# Altium PCB JTAG_XILINX.PcbDoc (part 1 of 2)
Units mm, origin at the board's own origin, x right, y up, seen from the top; angles counter-clockwise.
Board outline 27.94 x 27.94 mm, 4 copper layers (Top Layer, GND, PWR, Bottom Layer), stack 0.603 mm thick; 44 components, 49 nets, 1237 pads, 94 vias.
Unrouted connection lines stored in the file: 218.
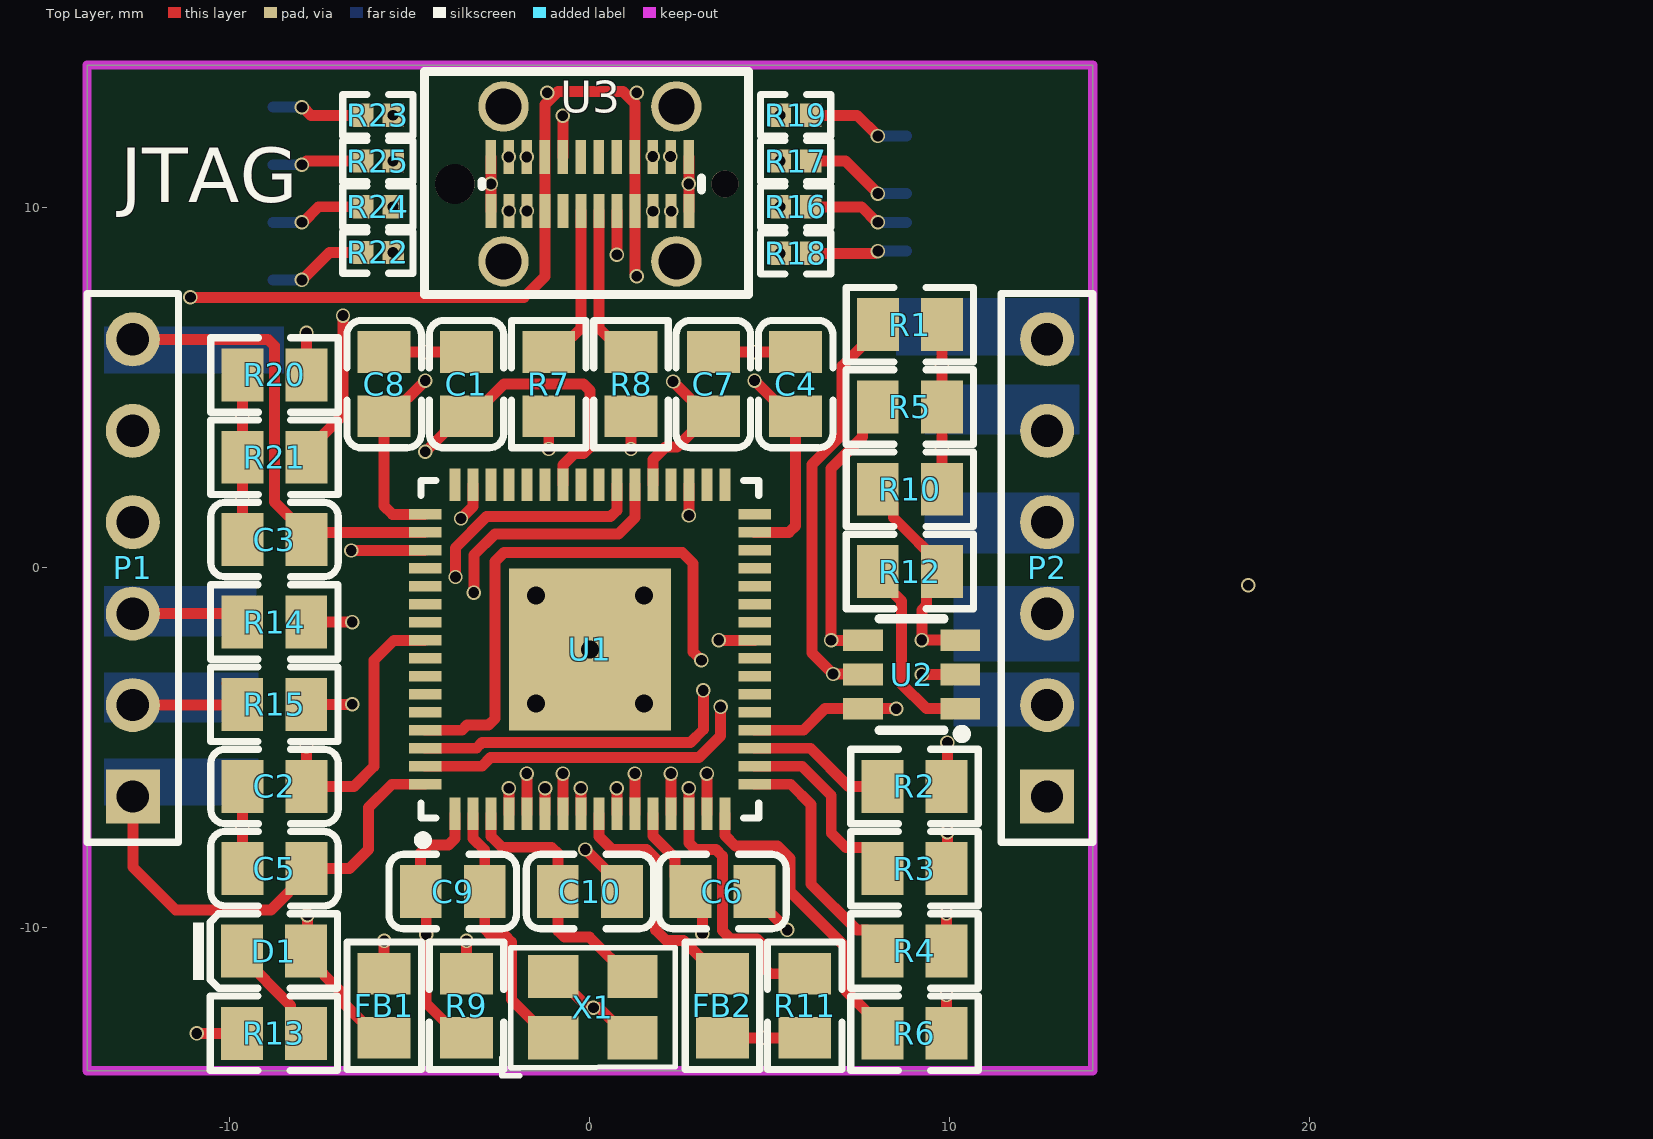
[diagram p0: Top Layer view]
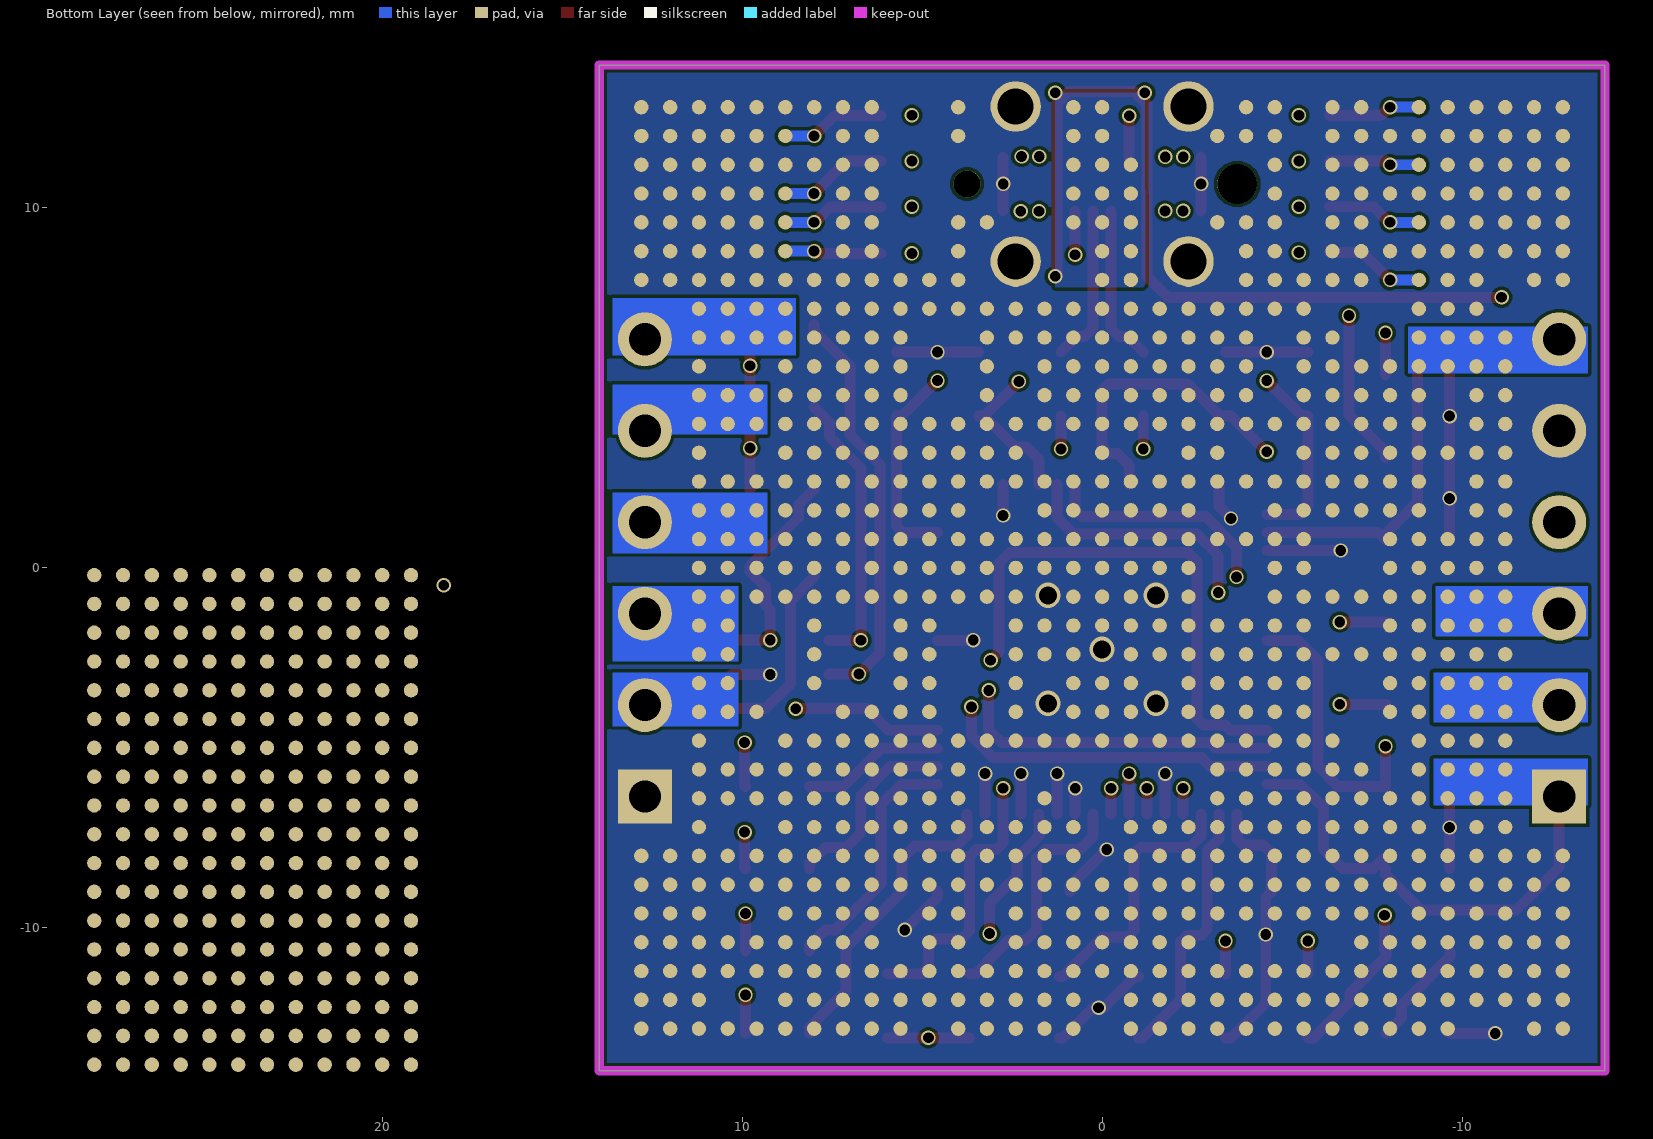
[diagram p1: Bottom Layer view, seen from below]
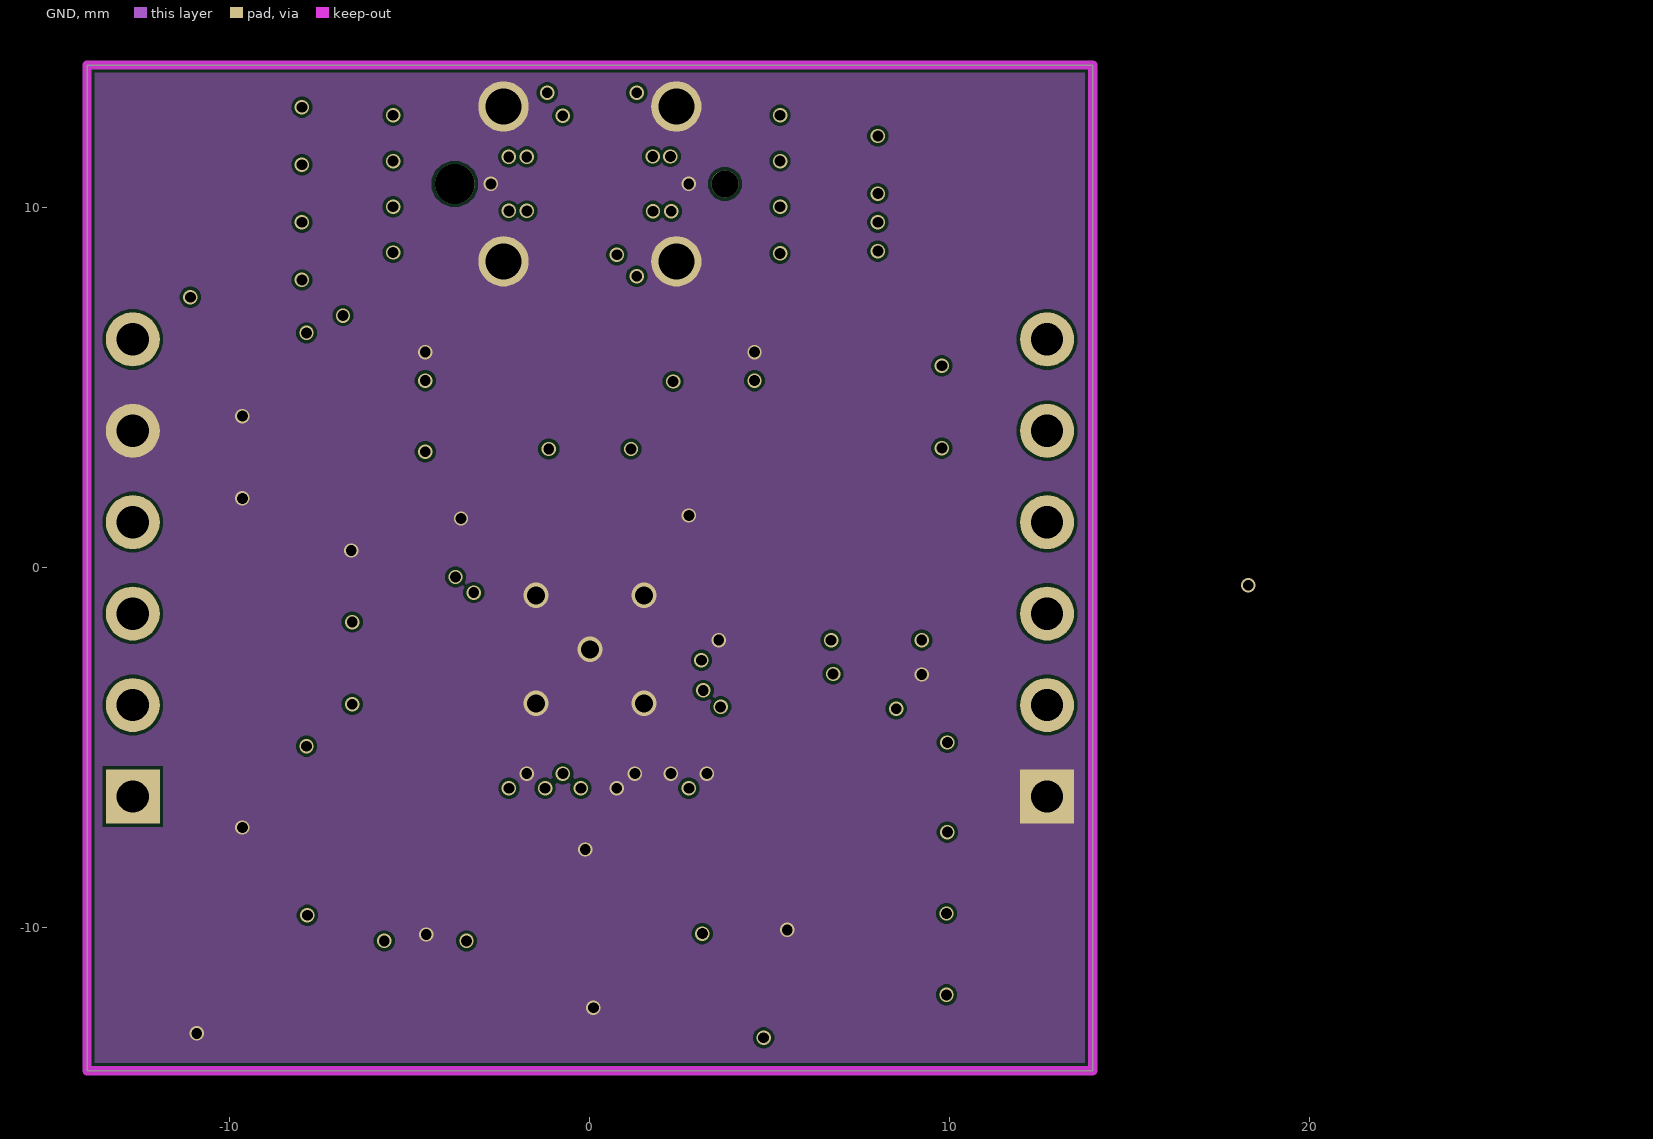
[diagram p2: GND]
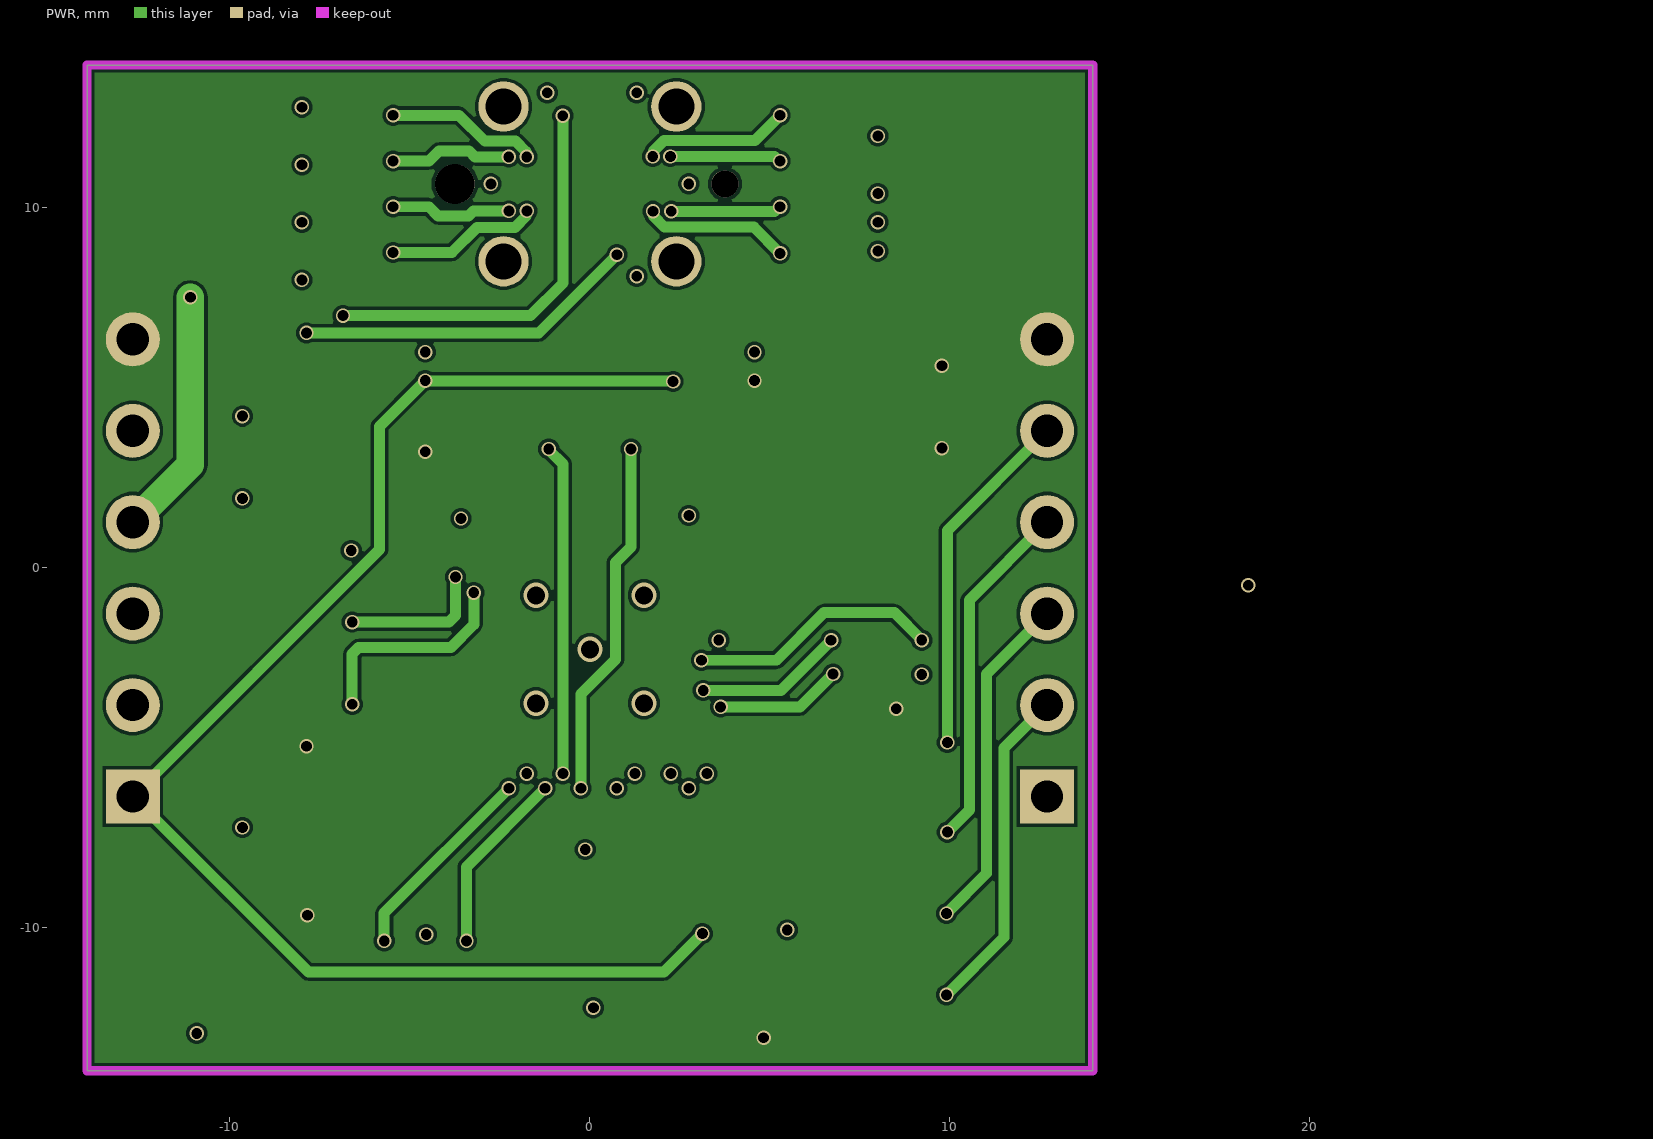
[diagram p3: PWR]

## Layer stack, top to bottom
Top Solder: solder mask 0.0102, Solder Resist, Dk 3.5
Top Layer: signal copper 0.0356
Dielectric 2: prepreg 0.0711, PP-006, Dk 4.1
GND: signal copper 0.035
Dielectric 1: dielectric 0.32, FR-4, Dk 4.8
PWR: signal copper 0.035
Dielectric 3: prepreg 0.0711, PP-006, Dk 4.1
Bottom Layer: signal copper 0.0356
Bottom Solder: solder mask 0.0102, Solder Resist, Dk 3.5

## Board outline
-13.97,-13.97 -13.97,13.97 13.97,13.97 13.97,-13.97

## Design rules (kind name [scope] priority, off if disabled: settings)
Clearance [All] p1: gap=0.089 ignorepadtopadclearanceinfootprint=FALSE
DiffPairsRouting [All] p1: maxlimit=0.254 minlimit=0.089 mostfreqgap=0.254 toplayer_minwidth=0.089 toplayer_maxwidth=0.381 toplayer_prefwidth=0.305 midlayer1_minwidth=0.089 midlayer1_maxwidth=0.381 midlayer1_prefwidth=0.305 midlayer2_minwidth=0.089 midlayer2_maxwidth=0.381 midlayer2_prefwidth=0.305 bottomlayer_minwidth=0.089 bottomlayer_maxwidth=0.381 bottomlayer_prefwidth=0.305 maxuncoupledlength=12.7
PlaneConnect [All] p1: planeconnectstyle=Direct reliefexpansion=0.508 reliefentries=4 reliefconductorwidth=0.254 reliefairgap=0.254
PolygonConnect [All] p1: connectstyle=Direct reliefconductorwidth=0.254 reliefentries=4 polygonreliefangle="90 Angle" airgapwidth=0.254
RoutingVias [All] p1: holewidth=0.711 width=1.27 viastyle="Through Hole" minholewidth=0.711 minwidth=1.27 maxholewidth=0.711 maxwidth=1.27
SolderMaskExpansion [All] p1: expansion=0.102 istentingtop=FALSE
SupplyNets "Schematic Supply Nets_11" [InNet('TX2N')] p1: voltage=0.000
SupplyNets "Schematic Supply Nets_10" [InNet('RX2N')] p2: voltage=0.000
SupplyNets "Schematic Supply Nets_9" [InNet('TX1N')] p3: voltage=0.000
SupplyNets "Schematic Supply Nets_8" [InNet('VCC_5V')] p4: voltage=0.000
SupplyNets "Schematic Supply Nets_7" [InNet('GND')] p5: voltage=0.000
SupplyNets "Schematic Supply Nets_6" [InNet('VCC_1V8')] p6: voltage=0.000
SupplyNets "Schematic Supply Nets_5" [InNet('RX1N')] p7: voltage=0.000
SupplyNets "Schematic Supply Nets_4" [InNet('VCC_3V3')] p8: voltage=0.000
SupplyNets "Schematic Supply Nets_3" [InNet('TX2P')] p9: voltage=0.000
SupplyNets "Schematic Supply Nets_2" [InNet('TX1P')] p10: voltage=0.000
SupplyNets "Schematic Supply Nets_1" [InNet('RX1P')] p11: voltage=0.000
SupplyNets "Schematic Supply Nets" [InNet('RX2P')] p12: voltage=0.000
Width [All] p1: maxlimit=2.54 minlimit=0.089 preferedwidth=0.305
28 further rules are at their usual default settings.

## Classes and differential pairs
differential pair USB_D: +USB_D_p -USB_D_n

## Components (designator, comment, footprint, x,y, rotation, side; value= is the part's Value field where it differs from the comment)
C1 "100nF" 0805_C -3.429,5.105 r270 top
C2 "100nF" 0805_C -8.763,-6.071 r0 top
C3 "100nF" 0805_C -8.763,0.787 r0 top
C4 "100nF" 0805_C 5.715,5.105 r270 top
C5 "100nF" 0805_C -8.763,-8.357 r0 top
C6 "100nF" 0805_C 3.683,-8.992 r180 top
C7 "100nF" 0805_C 3.429,5.106 r270 top
C8 "4.7uF" 0805_C -5.715,5.105 r270 top
C9 "12pF (120) 5% 50V" 0805_C -3.811,-8.992 r0 top
C10 "12pF (120) 5% 50V" 0805_C 0,-8.992 r180 top
D1 "翠绿 0805" 0805_LED_S1 -8.778,-10.645 r0 top
FB1 "100Ω ±25% 100MHz" 0805_L -5.715,-12.167 r270 top
FB2 "100Ω ±25% 100MHz" 0805_L 3.683,-12.166 r270 top
P1 "Header 6" HDR1X6 -12.7,-6.35 r90 top locked
P2 "Header 6" HDR1X6 12.7,-6.35 r90 top locked
R1 "10KΩ (1002) ±1%" 0805_R 8.891,6.756 r0 top
R2 "33Ω" 0805_R 9.018,-6.071 r0 top
R3 "33Ω" 0805_R 9.018,-8.357 r0 top
R4 "33Ω" 0805_R 9.018,-10.643 r0 top
R5 "10KΩ (1002) ±1%" 0805_R 8.889,4.47 r0 top
R6 "33Ω" 0805_R 9.018,-12.929 r0 top
R7 "33Ω" 0805_R -1.143,5.105 r270 top
R8 "33Ω" 0805_R 1.143,5.105 r270 top
R9 "12KΩ" 0805_R -3.429,-12.167 r90 top
R10 "10KΩ (1002) ±1%" 0805_R 8.89,2.184 r0 top
R11 "1KΩ" 0805_R 5.969,-12.166 r90 top
R12 "2.2KΩ" 0805_R 8.89,-0.102 r180 top
R13 "1KΩ (1001) ±1%" 0805_R -8.778,-12.931 r0 top
R14 "33Ω" 0805_R -8.771,-1.505 r180 top
R15 "33Ω" 0805_R -8.771,-3.791 r180 top
R16 "0Ω" 0402_R 5.715,10.033 r180 top
R17 "0Ω" 0402_R 5.715,11.303 r0 top
R18 "0Ω" 0402_R 5.715,8.738 r180 top
R19 "0Ω" 0402_R 5.715,12.573 r0 top
R20 "5.1KΩ" 0805_R -8.763,5.359 r0 top
R21 "5.1KΩ" 0805_R -8.764,3.073 r180 top
R22 "0Ω" 0402_R -5.893,8.763 r0 top
R23 "0Ω" 0402_R -5.893,12.573 r180 top
R24 "0Ω" 0402_R -5.893,10.033 r0 top
R25 "0Ω" 0402_R -5.893,11.303 r180 top
U1 "FT2232HQ-REEL" QFN-64_L9.0-W9.0-P0.50-TL-EP4.3 0,-2.261 r90 top locked
U2 "93LC56BT-I/OT" SOT-23-6_L2.9-W1.6-P0.95-LS2.8-BR 8.937,-2.962 r0 top locked
U3 "Socket" "USB Type C 贴片 24P" 0,10.668 r180 top locked
X1 "12MHz" 3225 -1.016,-13.056 r0 top value=8MHz

## Footprints (in the part's own frame and the unit in brackets; to place one, negate y for a bottom-side part, rotate by r counter-clockwise, add the part's x,y. Pads: shape width x height; smd on the part's side, far side on the other; paste and mask are expansions set on the pad)
0402_R [mm]
  rect 0.6x0.65 smd mask+0.051: 1(-0.425,0) 2(0.425,0)
  silkscreen extent -0.97,-0.58 0.97,0.58, body extent -0.57,-0.27 0.58,0.28, height 0.41
0805_C [mm]
  rect 1.16x1.47 smd: 1(-0.89,0) 2(0.89,0)
  silkscreen extent -1.77,-1.04 1.77,1.04, body extent -1,-0.62 1,0.63, height 0.77
0805_L [mm]
  rect 1.16x1.47 smd: 1(-0.89,0) 2(0.89,0)
  silkscreen extent -1.77,-1.04 1.77,1.03, body extent -1.02,-0.64 1.03,0.64, height 0.6
0805_LED_S1 [mm]
  rect 1.16x1.47 smd: A(0.89,0) K(-0.89,0)
  silkscreen extent -2.24,-1.04 1.77,1.03, body extent -1.01,-0.62 1.01,0.62, height 1.1
0805_R [mm]
  rect 1.16x1.47 smd: 1(-0.89,0) 2(0.89,0)
  silkscreen extent -1.77,-1.04 1.77,1.03, body extent -1,-0.62 1,0.63, height 0.49
3225 [mm]
  rect 1.4x1.2 smd: 1(0,0) 2(2.2,0) 3(2.2,1.702) 4(0,1.702)
  silkscreen extent -1.44,-1.05 3.39,2.5
HDR1X6 [mm] "Connector; Header; 6 Position"
  rect 1.5x1.5 hole 0.9: 1(0,0)
  round 1.5 hole 0.9: 2(2.54,0) 3(5.08,0) 4(7.62,0) 5(10.16,0) 6(12.7,0)
  silkscreen extent -1.27,-1.27 13.97,1.27
QFN-64_L9.0-W9.0-P0.50-TL-EP4.3 [mm]
  rect 0.9x0.3 smd paste+0 mask+0.05: 1(-4.575,3.75) 2(-4.575,3.25) 3(-4.575,2.75) 4(-4.575,2.25) 5(-4.575,1.75) 6(-4.575,1.25) 7(-4.575,0.75) 8(-4.575,0.25) 9(-4.575,-0.25) 10(-4.575,-0.75) 11(-4.575,-1.25) 12(-4.575,-1.75) 13(-4.575,-2.25) 14(-4.575,-2.75) 15(-4.575,-3.25) 16(-4.575,-3.75) 33(4.575,-3.75) 34(4.575,-3.25) 35(4.575,-2.75) 36(4.575,-2.25) 37(4.575,-1.75) 38(4.575,-1.25) 39(4.575,-0.75) 40(4.575,-0.25) 41(4.575,0.25) 42(4.575,0.75) 43(4.575,1.25) 44(4.575,1.75) 45(4.575,2.25) 46(4.575,2.75) 47(4.575,3.25) 48(4.575,3.75)
  rect 0.3x0.9 smd paste+0 mask+0.05: 17(-3.75,-4.575) 18(-3.25,-4.575) 19(-2.75,-4.575) 20(-2.25,-4.575) 21(-1.75,-4.575) 22(-1.25,-4.575) 23(-0.75,-4.575) 24(-0.25,-4.575) 25(0.25,-4.575) 26(0.75,-4.575) 27(1.25,-4.575) 28(1.75,-4.575) 29(2.25,-4.575) 30(2.75,-4.575) 31(3.25,-4.575) 32(3.75,-4.575) 49(3.75,4.575) 50(3.25,4.575) 51(2.75,4.575) 52(2.25,4.575) 53(1.75,4.575) 54(1.25,4.575) 55(0.75,4.575) 56(0.25,4.575) 57(-0.25,4.575) 58(-0.75,4.575) 59(-1.25,4.575) 60(-1.75,4.575) 61(-2.25,4.575) 62(-2.75,4.575) 63(-3.25,4.575) 64(-3.75,4.575)
  rect 4.5x4.5 smd paste+0 mask+0.05: 65(0,0)
  silkscreen extent -5.43,-4.69 4.69,4.76
SOT-23-6_L2.9-W1.6-P0.95-LS2.8-BR [mm]
  rect 1.1x0.6 smd paste+0 mask+0.051: 1(1.35,-0.95) 2(1.35,0) 3(1.35,0.95) 4(-1.35,0.95) 5(-1.35,0) 6(-1.35,-0.95)
  silkscreen extent -0.9,-1.78 1.52,1.55
"USB Type C 贴片 24P" [mm]
  round 1.4 hole 1: 25(2.4,2.15) 26(-2.4,2.15) 27(-2.4,-2.15) 28(2.4,-2.15)
  rect 0.3x0.95 smd: A1(-2.75,0.75) A2(-2.25,0.75) A3(-1.75,0.75) A4(-1.25,0.75) A5(-0.75,0.75) A6(-0.25,0.75) A7(0.25,0.75) A8(0.75,0.75) A9(1.25,0.75) A10(1.75,0.75) A11(2.25,0.75) A12(2.75,0.75) B1(2.752,-0.752) B2(2.252,-0.752) B3(1.752,-0.752) B4(1.252,-0.752) B5(0.752,-0.752) B6(0.252,-0.752) B7(-0.248,-0.752) B8(-0.748,-0.752) B9(-1.248,-0.752) B10(-1.748,-0.752) B11(-2.248,-0.752) B12(-2.748,-0.752)
  round 0.75 hole 0.75 unplated: ""(-3.75,0)
  round 1.1 hole 1.1 unplated: ""(3.75,0.003)
  silkscreen extent -4.41,-3.13 4.59,3.07

## Part data
C1 C2 C3 C4 C5 C6 C7: library part "0805 100nF(104) 10% 50V", "贴片电容", Package=0805, SuppliersPartNumber=C49678, ComponentLink1Description=供应商链接, ComponentLink1URL=http://www.szlcsc.com/product/details_50686.html, Supplier=LC
C8: library part "0805 4.7uF (475) 10% 25V", "贴片电容", Package=0805, SuppliersPartNumber=C1779, ComponentLink1Description=供应商链接, ComponentLink1URL=http://www.szlcsc.com/product/details_2131.html, Supplier=LC
C9 C10: library part "0805 12pF (120) 5% 50V", "贴片电容", Package=0805, SuppliersPartNumber=C1792, ComponentLink1Description=供应商链接, ComponentLink1URL=http://www.szlcsc.com/product/details_2144.html, Supplier=LC
D1: library part "0805 翠绿", "发光二极管", Package=0805, SuppliersPartNumber=C2297, ComponentLink1Description=供应商链接, ComponentLink1URL=http://www.szlcsc.com/product/details_2670.html, Supplier=LC
FB1 FB2: library part "0805 100Ω 25% 100MHz", "贴片磁珠", Package=0805, SuppliersPartNumber=C1015, ComponentLink1Description=供应商链接, ComponentLink1URL=http://www.szlcsc.com/product/details_1367.html, Supplier=LC
P1 P2: "Header, 6-Pin", LatestRevisionDate=17-Jul-2002, LatestRevisionNote="Re-released for DXP Platform.", Publisher="Altium Limited"
R1 R5 R10: library part "0805 10KΩ (1002) 1%", "贴片电阻", Package=0805, SuppliersPartNumber=C17414, ComponentLink1Description=供应商链接, ComponentLink1URL=http://www.szlcsc.com/product/details_18102.html, Supplier=LC
R2 R3 R4 R6 R7 R8 R14 R15: library part "0805 33Ω (33R0) 1%", "贴片电阻", Package=0805, SuppliersPartNumber=C17634, ComponentLink1Description=供应商链接, ComponentLink1URL=http://www.szlcsc.com/product/details_18322.html, Supplier=LC
R9: library part "0805 12KΩ (1202) 1%", "贴片电阻", Package=0805, SuppliersPartNumber=C17444, ComponentLink1Description=供应商链接, ComponentLink1URL=http://www.szlcsc.com/product/details_18132.html, Supplier=LC
R11 R13: library part "0805 1KΩ (1001) 1%", "贴片电阻", Package=0805, SuppliersPartNumber=C17513, ComponentLink1Description=供应商链接, ComponentLink1URL=http://www.szlcsc.com/product/details_18201.html, Supplier=LC
R12: library part "0805 2.2KΩ (2201) 1%", "贴片电阻", Package=0805, SuppliersPartNumber=C17520, ComponentLink1Description=供应商链接, ComponentLink1URL=http://www.szlcsc.com/product/details_18208.html, Supplier=LC
R16 R17 R18 R19 R22 R23 R24 R25: library part "0402 0Ω (0R0) 1%", "贴片电阻", Package=0402, SuppliersPartNumber=C17168, ComponentLink1Description=供应商链接, ComponentLink1URL=http://www.szlcsc.com/product/details_17853.html, Supplier=LC
R20 R21: library part "0805 5.1KΩ (5101) 1%", "贴片电阻", Package=0805, SuppliersPartNumber=C27834, ComponentLink1Description=供应商链接, ComponentLink1URL=http://www.szlcsc.com/product/details_28584.html, Supplier=LC
U1: JLCPCB Part Class="Extended Part", LCSC Part Name="FT2232H 双高速 USB 转多用途 UART/FIFO IC", Manufacturer=FTDI(飞特帝亚), Operating Temperature=-40℃~+85℃, Supply Voltage=3V~3.6V, Add into BOM=yes, Applications Function=USB转UART；USB转FIFO, Convert to PCB=yes, Datasheet=https://atta.szlcsc.com/upload/public/pdf/source/20180530/C193662_F14B45A4B5271BE746E436B0F2E041EE.pdf, Device=FT2232HQ-REEL, Manufacturer Part=FT2232HQ-REEL, Protocol=-, Supplier=LCSC, Supplier Footprint=QFN-64-EP(9x9), Supplier Part=C193662, Symbol=FT2232HQ-REEL
U2: JLCPCB Part Class="Extended Part", Manufacturer=MICROCHIP(美国微芯), Operating Temperature=-40℃~+85℃, Supply Voltage=2.5V~5.5V, Add into BOM=yes, Convert to PCB=yes, Data Retention - TDR (Year)=200年, Datasheet=https://atta.szlcsc.com/upload/public/pdf/source/20140724/1457707164359.pdf, Device=93LC56BT-I/OT, Interface Type=SPI, LCSC Part Name=93LC56BT-I/OT, Manufacturer Part=93LC56BT-I/OT, Memory Size=2Kbit, Supplier=LCSC, Supplier Footprint=SOT-23-6, Supplier Part=C190271, Symbol=93LC56BT-I/OT, Write Cycle Endurance=1000000次, Write Cycle Time (Tw)=6ms
U3: library part "USB type C 沉板公头"
X1: library part 四脚无源晶体, "4脚贴片无源晶体", Equivalent Series Resistance(ESR)=250Ω, Frequency Stability=±15ppm, JLCPCB Part Class="Extended Part", LCSC Part Name="8MHz ±10ppm 10pF", Load Capacitance=10pF, Manufacturer=YJX(雅晶鑫), Manufacturer Part=TAXM8M4RDBCCT2T, Normal temperature Frequency Tolerance=±10ppm, Operating Temperature=-40℃~+85℃, Add into BOM=yes, Convert to PCB=yes, Datasheet=https://atta.szlcsc.com/upload/public/pdf/source/20190626/C400090_CF95B89E745AFE4EF2E392EF8AC009D6.pdf, Device=TAXM8M4RDBCCT2T, Supplier=LCSC, Supplier Footprint=SMD3225-4P, Supplier Part=C400090, Symbol=TAXM8M4RDBCCT2T, Type=贴片晶振

## Free pads (board coordinates)
  round 0.4 smd far side: 2(-12.8,-12.8) 2(-12.8,-12) 2(-12.8,-11.2) 2(-12.8,-10.4) 2(-12.8,-9.6) 2(-12.8,-8.8) 2(-12.8,-8) 2(-12.8,8) 2(-12.8,8.8) 2(-12.8,9.6) 2(-12.8,10.4) 2(-12.8,11.2) 2(-12.8,12) 2(-12.8,12.8) 2(-12,-12.8) 2(-12,-12) 2(-12,-11.2) 2(-12,-10.4) 2(-12,-9.6) 2(-12,-8.8) 2(-12,-8) 2(-12,8) 2(-12,8.8) 2(-12,9.6) 2(-12,10.4) 2(-12,11.2) 2(-12,12) 2(-12,12.8) 2(-11.2,-12) 2(-11.2,-11.2) 2(-11.2,-10.4) 2(-11.2,-9.6) 2(-11.2,-8.8) 2(-11.2,-8) 2(-11.2,-7.2) 2(-11.2,-6.4) 2(-11.2,-5.6) 2(-11.2,-4.8) 2(-11.2,-4) 2(-11.2,-3.2) 2(-11.2,-2.4) 2(-11.2,-1.6) 2(-11.2,-0.8) 2(-11.2,0) 2(-11.2,0.8) 2(-11.2,1.6) 2(-11.2,2.4) 2(-11.2,3.2) 2(-11.2,4) 2(-11.2,4.8) 2(-11.2,5.6) 2(-11.2,6.4) 2(-11.2,8.8) 2(-11.2,9.6) 2(-11.2,10.4) 2(-11.2,11.2) 2(-11.2,12) 2(-11.2,12.8) 2(-10.4,-12) 2(-10.4,-11.2) 2(-10.4,-10.4) 2(-10.4,-9.6) 2(-10.4,-8.8) 2(-10.4,-8) 2(-10.4,-7.2) 2(-10.4,-6.4) 2(-10.4,-5.6) 2(-10.4,-4.8) 2(-10.4,-4) 2(-10.4,-3.2) 2(-10.4,-2.4) 2(-10.4,-1.6) 2(-10.4,-0.8) 2(-10.4,0) 2(-10.4,0.8) 2(-10.4,1.6) 2(-10.4,2.4) 2(-10.4,3.2) 2(-10.4,4) 2(-10.4,4.8) 2(-10.4,5.6) 2(-10.4,6.4) 2(-10.4,7.2) 2(-10.4,8) 2(-10.4,8.8) 2(-10.4,9.6) 2(-10.4,10.4) 2(-10.4,11.2) 2(-10.4,12) 2(-10.4,12.8) 2(-9.6,-12.8) 2(-9.6,-12) 2(-9.6,-11.2) 2(-9.6,-10.4) 2(-9.6,-9.6) 2(-9.6,-8.8) 2(-9.6,-8) 2(-9.6,-6.4) 2(-9.6,-5.6) 2(-9.6,-4.8) 2(-9.6,-4) 2(-9.6,-3.2) 2(-9.6,-2.4) 2(-9.6,-1.6) 2(-9.6,-0.8) 2(-9.6,0) 2(-9.6,0.8) 2(-9.6,3.2) 2(-9.6,5.6) 2(-9.6,6.4) 2(-9.6,7.2) 2(-9.6,8) 2(-9.6,8.8) 2(-9.6,9.6) 2(-9.6,10.4) 2(-9.6,11.2) 2(-9.6,12) 2(-9.6,12.8) 2(-8.8,-12.8) 2(-8.8,-12) 2(-8.8,-11.2) 2(-8.8,-10.4) 2(-8.8,-9.6) 2(-8.8,-8.8) 2(-8.8,-8) 2(-8.8,-7.2) 2(-8.8,-6.4) 2(-8.8,-5.6) 2(-8.8,-4.8) 2(-8.8,-4) 2(-8.8,-3.2) 2(-8.8,-2.4) 2(-8.8,-1.6) 2(-8.8,-0.8) 2(-8.8,0) 2(-8.8,0.8) 2(-8.8,1.6) 2(-8.8,2.4) 2(-8.8,3.2) 2(-8.8,4) 2(-8.8,4.8) 2(-8.8,5.6) 2(-8.8,6.4) 2(-8.8,7.2) 2(-8.8,8) 2(-8.8,8.8) 2(-8.8,9.6) 2(-8.8,10.4) 2(-8.8,11.2) 2(-8.8,12) 2(-8.8,12.8) 2(-8,-12.8) 2(-8,-12) 2(-8,-11.2) 2(-8,-10.4) 2(-8,-8.8) 2(-8,-8) 2(-8,-7.2) 2(-8,-6.4) 2(-8,-4) 2(-8,-3.2) 2(-8,-2.4) 2(-8,-1.6) 2(-8,-0.8) 2(-8,0) 2(-8,0.8) 2(-8,1.6) 2(-8,2.4) 2(-8,3.2) 2(-8,4) 2(-8,4.8) 2(-8,5.6) 2(-8,8.8) 2(-8,10.4) 2(-8,12) 2(-7.2,-12.8) 2(-7.2,-12) 2(-7.2,-11.2) 2(-7.2,-10.4) 2(-7.2,-9.6) 2(-7.2,-8.8) 2(-7.2,-8) 2(-7.2,-7.2) 2(-7.2,-6.4) 2(-7.2,-5.6) 2(-7.2,-2.4) 2(-7.2,-0.8) 2(-7.2,1.6) 2(-7.2,2.4) 2(-7.2,3.2) 2(-7.2,4) 2(-7.2,4.8) 2(-7.2,5.6) 2(-7.2,8) 2(-7.2,8.8) 2(-7.2,9.6) 2(-7.2,10.4) 2(-7.2,11.2) 2(-7.2,12) 2(-7.2,12.8) 2(-6.4,-12.8) 2(-6.4,-12) 2(-6.4,-11.2) 2(-6.4,-9.6) 2(-6.4,-8.8) 2(-6.4,-8) 2(-6.4,-7.2) 2(-6.4,-6.4) 2(-6.4,-5.6) 2(-6.4,-4.8) 2(-6.4,-2.4) 2(-6.4,-0.8) 2(-6.4,1.6) 2(-6.4,2.4) 2(-6.4,3.2) 2(-6.4,4) 2(-6.4,4.8) 2(-6.4,5.6) 2(-6.4,6.4) 2(-6.4,8) 2(-6.4,8.8) 2(-6.4,9.6) 2(-6.4,10.4) 2(-6.4,11.2) 2(-6.4,12) 2(-6.4,12.8) 2(-5.6,-1.6) 2(-5.6,-0.8) 2(-5.6,0) 2(-5.6,0.8) 2(-5.6,1.6) 2(-5.6,2.4) 2(-5.6,3.2) 2(-5.6,4) 2(-5.6,4.8) 2(-5.6,5.6) 2(-5.6,6.4) 2(-5.6,7.2) 2(-5.6,8) 2(-5.6,-12.8) 2(-5.6,-12) 2(-5.6,-11.2) 2(-5.6,-9.6) 2(-5.6,-8.8) 2(-5.6,-8) 2(-5.6,-7.2) 2(-5.6,-6.4) 2(-5.6,-5.6) 2(-5.6,-4.8) 2(-5.6,-4) 2(-5.6,-3.2) 2(-5.6,-2.4) 2(-4.8,-1.6) 2(-4.8,-0.8) 2(-4.8,0) 2(-4.8,0.8) 2(-4.8,1.6) 2(-4.8,2.4) 2(-4.8,4) 2(-4.8,7.2) 2(-4.8,8) 2(-4.8,8.8) 2(-4.8,9.6) 2(-4.8,10.4) 2(-4.8,11.2) 2(-4.8,12) 2(-4.8,12.8) 2(-4.8,-12.8) 2(-4.8,-12) 2(-4.8,-11.2) 2(-4.8,-9.6) 2(-4.8,-8.8) 2(-4.8,-8) 2(-4.8,-7.2) 2(-4.8,-6.4) 2(-4.8,-5.6) 2(-4.8,-4.8) 2(-4.8,-4) 2(-4.8,-3.2) 2(-4.8,-2.4) 2(-4,-1.6) 2(-4,0.8) 2(-4,2.4) 2(-4,4) 2(-4,4.8) 2(-4,5.6) 2(-4,6.4) 2(-4,7.2) 2(-4,8) 2(-4,8.8) 2(-4,9.6) 2(-4,12) 2(-4,12.8) 2(-4,-12.8) 2(-4,-12) 2(-4,-11.2) 2(-4,-9.6) 2(-4,-8.8) 2(-4,-8) 2(-4,-7.2) 2(-4,-6.4) 2(-4,-5.6) 2(-4,-4.8) 2(-4,-4) 2(-4,-3.2) 2(-4,-2.4) 2(-3.2,-1.6) 2(-3.2,0.8) 2(-3.2,2.4) 2(-3.2,3.2) 2(-3.2,4) 2(-3.2,4.8) 2(-3.2,5.6) 2(-3.2,6.4) 2(-3.2,7.2) 2(-3.2,9.6) 2(-3.2,12) 2(-3.2,-12.8) 2(-3.2,-12) 2(-3.2,-11.2) 2(-3.2,-9.6) 2(-3.2,-8.8) 2(-3.2,-8) 2(-3.2,-7.2) 2(-3.2,-6.4) 2(-3.2,-5.6) 2(-3.2,-4.8) 2(-3.2,-4) 2(-3.2,-3.2) 2(-3.2,-2.4) 2(-2.4,-1.6) 2(-2.4,-0.8) 2(-2.4,0) 2(-2.4,0.8) 2(-2.4,1.6) 2(-2.4,2.4) 2(-2.4,3.2) 2(-2.4,4) 2(-2.4,4.8) 2(-2.4,5.6) 2(-2.4,6.4) 2(-2.4,7.2) 2(-2.4,8) 2(-2.4,8.8) 2(-2.4,-12.8) 2(-2.4,-12) 2(-2.4,-11.2) 2(-2.4,-10.4) 2(-2.4,-9.6) 2(-2.4,-8.8) 2(-2.4,-8) 2(-2.4,-7.2) 2(-2.4,-4.8) 2(-2.4,-4) 2(-2.4,-3.2) 2(-2.4,-2.4) 2(-1.6,-1.6) 2(-1.6,-0.8) 2(-1.6,0) 2(-1.6,0.8) 2(-1.6,1.6) 2(-1.6,2.4) 2(-1.6,4) 2(-1.6,4.8) 2(-1.6,5.6) 2(-1.6,6.4) 2(-1.6,7.2) 2(-1.6,-12.8) 2(-1.6,-12) 2(-1.6,-11.2) 2(-1.6,-10.4) 2(-1.6,-9.6) 2(-1.6,-8.8) 2(-1.6,-8) 2(-1.6,-7.2) 2(-1.6,-4.8) 2(-1.6,-2.4) 2(-0.8,-1.6) 2(-0.8,-0.8) 2(-0.8,0) 2(-0.8,0.8) 2(-0.8,1.6) 2(-0.8,2.4) 2(-0.8,4) 2(-0.8,4.8) 2(-0.8,5.6) 2(-0.8,6.4) 2(-0.8,7.2) 2(-0.8,8) 2(-0.8,8.8) 2(-0.8,9.6) 2(-0.8,10.4) 2(-0.8,11.2) 2(-0.8,-12.8) 2(-0.8,-12) 2(-0.8,-11.2) 2(-0.8,-10.4) 2(-0.8,-9.6) 2(-0.8,-8.8) 2(-0.8,-8) 2(-0.8,-7.2) 2(-0.8,-4.8) 2(-0.8,-4) 2(-0.8,-3.2) 2(-0.8,-2.4) 2(0,-2.261) 2(0,-1.6) 2(0,-0.8) 2(0,0) 2(0,0.8) 2(0,1.6) 2(0,2.4) 2(0,3.2) 2(0,4) 2(0,4.8) 2(0,5.6) 2(0,6.4) 2(0,7.2) 2(0,8) 2(0,8.8) 2(0,9.6) 2(0,10.4) 2(0,11.2) 2(0,12) 2(0,12.8) 2(0,-11.2) 2(0,-10.4) 2(0,-9.6) 2(0,-8.8) 2(0,-4.8) 2(0,-4) 2(0,-3.2) 2(0.8,-2.4) 2(0.8,-1.6) 2(0.8,-0.8) 2(0.8,0) 2(0.8,0.8) 2(0.8,1.6) 2(0.8,2.4) 2(0.8,4) 2(0.8,4.8) 2(0.8,5.6) 2(0.8,6.4) 2(0.8,7.2) 2(0.8,9.6) 2(0.8,10.4) 2(0.8,11.2) 2(0.8,12) 2(0.8,12.8) 2(0.8,-12.8) 2(0.8,-12) 2(0.8,-11.2) 2(0.8,-10.4) 2(0.8,-9.6) 2(0.8,-8.8) 2(0.8,-8) 2(0.8,-7.2) 2(0.8,-4.8) 2(0.8,-4) 2(0.8,-3.2) 2(0.8,-2.4) 2(1.6,-1.6) 2(1.6,-0.8) 2(1.6,0) 2(1.6,0.8) 2(1.6,1.6) 2(1.6,2.4) 2(1.6,4) 2(1.6,4.8) 2(1.6,5.6) 2(1.6,6.4) 2(1.6,7.2) 2(1.6,-12.8) 2(1.6,-12) 2(1.6,-11.2) 2(1.6,-10.4) 2(1.6,-9.6) 2(1.6,-8.8) 2(1.6,-8) 2(1.6,-7.2) 2(1.6,-6.4) 2(1.6,-4.8) 2(1.6,-2.4) 2(2.4,-1.6) 2(2.4,-0.8) 2(2.4,0) 2(2.4,0.8) 2(2.4,2.4) 2(2.4,3.2) 2(2.4,4) 2(2.4,6.4) 2(2.4,7.2) 2(2.4,8) 2(2.4,8.8) 2(2.4,-12.8) 2(2.4,-12) 2(2.4,-11.2) 2(2.4,-10.4) 2(2.4,-9.6) 2(2.4,-8.8) 2(2.4,-8) 2(2.4,-7.2) 2(2.4,-4.8) 2(2.4,-4) 2(2.4,-3.2) 2(2.4,-2.4) 2(3.2,-0.8) 2(3.2,0) 2(3.2,0.8) 2(3.2,2.4) 2(3.2,3.2) 2(3.2,4) 2(3.2,4.8) 2(3.2,5.6) 2(3.2,6.4) 2(3.2,7.2) 2(3.2,9.6) 2(3.2,-12.8) 2(3.2,-12) 2(3.2,-11.2) 2(3.2,-8.8) 2(3.2,-8) 2(3.2,-7.2) 2(3.2,-4.8) 2(4,-12.8) 2(4,-12) 2(4,-11.2) 2(4,-10.4) 2(4,-9.6) 2(4,-8.8) 2(4,-8) 2(4,-7.2) 2(4,-6.4) 2(4,-5.6) 2(4,-4.8) 2(4,-0.8) 2(4,0) 2(4,0.8) 2(4,1.6) 2(4,2.4) 2(4,3.2) 2(4,4) 2(4,7.2) 2(4,8) 2(4,8.8) 2(4,9.6) 2(4,12) 2(4,12.8) 2(4.8,-12) 2(4.8,-11.2) 2(4.8,-10.4) 2(4.8,-9.6) 2(4.8,-8.8) 2(4.8,-8) 2(4.8,-7.2) 2(4.8,-6.4) 2(4.8,-5.6) 2(4.8,-4.8) 2(4.8,-4) 2(4.8,-3.2) 2(4.8,-2.4) 2(4.8,-1.6) 2(4.8,-0.8) 2(4.8,0) 2(4.8,0.8) 2(4.8,1.6) 2(4.8,2.4) 2(4.8,3.2) 2(4.8,4) 2(4.8,7.2) 2(4.8,8) 2(5.6,-12.8) 2(5.6,-12) 2(5.6,-11.2) 2(5.6,-8.8) 2(5.6,-8) 2(5.6,-7.2) 2(5.6,-6.4) 2(5.6,-5.6) 2(5.6,-4.8) 2(5.6,-4) 2(5.6,-3.2) 2(5.6,-2.4) 2(5.6,-1.6) 2(5.6,-0.8) 2(5.6,0) 2(5.6,0.8) 2(5.6,1.6) 2(5.6,2.4) 2(5.6,3.2) 2(5.6,4) 2(5.6,4.8) 2(5.6,5.6) 2(5.6,6.4) 2(5.6,7.2) 2(5.6,8) 2(6.4,-12.8) 2(6.4,-12) 2(6.4,-11.2) 2(6.4,-10.4) 2(6.4,-9.6) 2(6.4,-8.8) 2(6.4,-8) 2(6.4,-7.2) 2(6.4,-6.4) 2(6.4,-5.6) 2(6.4,-4.8) 2(6.4,-4) 2(6.4,-0.8) 2(6.4,0) 2(6.4,0.8) 2(6.4,1.6) 2(6.4,2.4) 2(6.4,3.2) 2(6.4,4) 2(6.4,4.8) 2(6.4,5.6) 2(6.4,6.4) 2(6.4,7.2) 2(6.4,8) 2(6.4,8.8) 2(6.4,9.6) 2(6.4,10.4) 2(6.4,11.2) 2(6.4,12) 2(6.4,12.8) 2(7.2,-12.8) 2(7.2,-12) 2(7.2,-11.2) 2(7.2,-10.4) 2(7.2,-9.6) 2(7.2,-8.8) 2(7.2,-8) 2(7.2,-7.2) 2(7.2,-6.4) 2(7.2,-5.6) 2(7.2,-4.8) 2(7.2,-4) 2(7.2,-0.8) 2(7.2,0) 2(7.2,0.8) 2(7.2,1.6) 2(7.2,2.4) 2(7.2,3.2) 2(7.2,4) 2(7.2,4.8) 2(7.2,5.6) 2(7.2,6.4) 2(7.2,7.2) 2(7.2,8) 2(7.2,8.8) 2(7.2,9.6) 2(7.2,10.4) 2(7.2,11.2) 2(7.2,12) 2(7.2,12.8) 2(8,-12.8) 2(8,-12) 2(8,-11.2) 2(8,-10.4) 2(8,-9.6) 2(8,-8.8) 2(8,-8) 2(8,-7.2) 2(8,-6.4) 2(8,-5.6) 2(8,-4.8) 2(8,-3.2) 2(8,-2.4) 2(8,-1.6) 2(8,-0.8) 2(8,0) 2(8,0.8) 2(8,1.6) 2(8,2.4) 2(8,3.2) 2(8,4) 2(8,4.8) 2(8,5.6) 2(8,6.4) 2(8,7.2) 2(8,8) 2(8,11.2) 2(8,12.8) 2(8.8,-12.8) 2(8.8,-12) 2(8.8,-11.2) 2(8.8,-10.4) 2(8.8,-9.6) 2(8.8,-8.8) 2(8.8,-8) 2(8.8,-7.2) 2(8.8,-6.4) 2(8.8,-5.6) 2(8.8,-4.8) 2(8.8,-0.8) 2(8.8,0) 2(8.8,0.8) 2(8.8,1.6) 2(8.8,2.4) 2(8.8,3.2) 2(8.8,4) 2(8.8,4.8) 2(8.8,5.6) 2(8.8,6.4) 2(8.8,7.2) 2(8.8,8) 2(8.8,8.8) 2(8.8,9.6) 2(8.8,10.4) 2(8.8,11.2) 2(8.8,12) 2(8.8,12.8) 2(9.6,-12.8) 2(9.6,-11.2) 2(9.6,-10.4) 2(9.6,-8.8) 2(9.6,-8) 2(9.6,-6.4) 2(9.6,-5.6) 2(9.6,-4) 2(9.6,-0.8) 2(9.6,0) 2(9.6,0.8) 2(9.6,1.6) 2(9.6,2.4) 2(9.6,4) 2(9.6,4.8) 2(9.6,6.4) 2(9.6,7.2) 2(9.6,8) 2(9.6,8.8) 2(9.6,9.6) 2(9.6,10.4) 2(9.6,11.2) 2(9.6,12) 2(9.6,12.8) 2(10.4,-12.8) 2(10.4,-11.2) 2(10.4,-10.4) 2(10.4,-8.8) 2(10.4,-8) 2(10.4,-6.4) 2(10.4,-5.6) 2(10.4,-4) 2(10.4,-3.2) 2(10.4,-2.4) 2(10.4,-1.6) 2(10.4,-0.8) 2(10.4,0) 2(10.4,0.8) 2(10.4,1.6) 2(10.4,2.4) 2(10.4,4) 2(10.4,4.8) 2(10.4,6.4) 2(10.4,7.2) 2(10.4,8) 2(10.4,8.8) 2(10.4,9.6) 2(10.4,10.4) 2(10.4,11.2) 2(10.4,12) 2(10.4,12.8) 2(11.2,-12.8) 2(11.2,-12) 2(11.2,-11.2) 2(11.2,-10.4) 2(11.2,-9.6) 2(11.2,-8.8) 2(11.2,-8) 2(11.2,-7.2) 2(11.2,-6.4) 2(11.2,-5.6) 2(11.2,-4.8) 2(11.2,-4) 2(11.2,-3.2) 2(11.2,-2.4) 2(11.2,-1.6) 2(11.2,-0.8) 2(11.2,0) 2(11.2,0.8) 2(11.2,1.6) 2(11.2,2.4) 2(11.2,3.2) 2(11.2,4) 2(11.2,4.8) 2(11.2,5.6) 2(11.2,6.4) 2(11.2,7.2) 2(11.2,8) 2(11.2,8.8) 2(11.2,9.6) 2(11.2,10.4) 2(11.2,11.2) 2(11.2,12) 2(11.2,12.8) 2(12,-12.8) 2(12,-12) 2(12,-11.2) 2(12,-10.4) 2(12,-9.6) 2(12,-8.8) 2(12,-8) 2(12,8) 2(12,8.8) 2(12,9.6) 2(12,10.4) 2(12,11.2) 2(12,12) 2(12,12.8) 2(12.8,-12.8) 2(12.8,-12) 2(12.8,-11.2) 2(12.8,-10.4) 2(12.8,-9.6) 2(12.8,-8.8) 2(12.8,-8) 2(12.8,-4) 2(12.8,-1.6) 2(12.8,-0.8) 2(12.8,8) 2(12.8,8.8) 2(12.8,9.6) 2(12.8,10.4) 2(12.8,11.2) 2(12.8,12) 2(12.8,12.8) 2(19.2,-13.8) 2(19.2,-13) 2(19.2,-12.2) 2(19.2,-11.4) 2(19.2,-10.6) 2(19.2,-9.8) 2(19.2,-9) 2(19.2,-8.2) 2(19.2,-7.4) 2(19.2,-6.6) 2(19.2,-5.8) 2(19.2,-5) 2(19.2,-4.2) 2(19.2,-3.4) 2(19.2,-2.6) 2(19.2,-1.8) 2(19.2,-1) 2(19.2,-0.2) 2(20,-13.8) 2(20,-13) 2(20,-12.2) 2(20,-11.4) 2(20,-10.6) 2(20,-9.8) 2(20,-9) 2(20,-8.2) 2(20,-7.4) 2(20,-6.6) 2(20,-5.8) 2(20,-5) 2(20,-4.2) 2(20,-3.4) 2(20,-2.6) 2(20,-1.8) 2(20,-1) 2(20,-0.2) 2(20.8,-13.8) 2(20.8,-13) 2(20.8,-12.2) 2(20.8,-11.4) 2(20.8,-10.6) 2(20.8,-9.8) 2(20.8,-9) 2(20.8,-8.2) 2(20.8,-7.4) 2(20.8,-6.6) 2(20.8,-5.8) 2(20.8,-5) 2(20.8,-4.2) 2(20.8,-3.4) 2(20.8,-2.6) 2(20.8,-1.8) 2(20.8,-1) 2(20.8,-0.2) 2(21.6,-13.8) 2(21.6,-13) 2(21.6,-12.2) 2(21.6,-11.4) 2(21.6,-10.6) 2(21.6,-9.8) 2(21.6,-9) 2(21.6,-8.2) 2(21.6,-7.4) 2(21.6,-6.6) 2(21.6,-5.8) 2(21.6,-5) 2(21.6,-4.2) 2(21.6,-3.4) 2(21.6,-2.6) 2(21.6,-1.8) 2(21.6,-1) 2(21.6,-0.2) 2(22.4,-13.8) 2(22.4,-13) 2(22.4,-12.2) 2(22.4,-11.4) 2(22.4,-10.6) 2(22.4,-9.8) 2(22.4,-9) 2(22.4,-8.2) 2(22.4,-7.4) 2(22.4,-6.6) 2(22.4,-5.8) 2(22.4,-5) 2(22.4,-4.2) 2(22.4,-3.4) 2(22.4,-2.6) 2(22.4,-1.8) 2(22.4,-1) 2(22.4,-0.2) 2(23.2,-13.8) 2(23.2,-13) 2(23.2,-12.2) 2(23.2,-11.4) 2(23.2,-10.6) 2(23.2,-9.8) 2(23.2,-9) 2(23.2,-8.2) 2(23.2,-7.4) 2(23.2,-6.6) 2(23.2,-5.8) 2(23.2,-5) 2(23.2,-4.2) 2(23.2,-3.4) 2(23.2,-2.6) 2(23.2,-1.8) 2(23.2,-1) 2(23.2,-0.2) 2(24,-13.8) 2(24,-13) 2(24,-12.2) 2(24,-11.4) 2(24,-10.6) 2(24,-9.8) 2(24,-9) 2(24,-8.2) 2(24,-7.4) 2(24,-6.6) 2(24,-5.8) 2(24,-5) 2(24,-4.2) 2(24,-3.4) 2(24,-2.6) 2(24,-1.8) 2(24,-1) 2(24,-0.2) 2(24.8,-13.8) 2(24.8,-13) 2(24.8,-12.2) 2(24.8,-11.4) 2(24.8,-10.6) 2(24.8,-9.8) 2(24.8,-9) 2(24.8,-8.2) 2(24.8,-7.4) 2(24.8,-6.6) 2(24.8,-5.8) 2(24.8,-5) 2(24.8,-4.2) 2(24.8,-3.4) 2(24.8,-2.6) 2(24.8,-1.8) 2(24.8,-1) 2(24.8,-0.2) 2(25.6,-13.8) 2(25.6,-13) 2(25.6,-12.2) 2(25.6,-11.4) 2(25.6,-10.6) 2(25.6,-9.8) 2(25.6,-9) 2(25.6,-8.2) 2(25.6,-7.4) 2(25.6,-6.6) 2(25.6,-5.8) 2(25.6,-5) 2(25.6,-4.2) 2(25.6,-3.4) 2(25.6,-2.6) 2(25.6,-1.8) 2(25.6,-1) 2(25.6,-0.2) 2(26.4,-13.8) 2(26.4,-13) 2(26.4,-12.2) 2(26.4,-11.4) 2(26.4,-10.6) 2(26.4,-9.8) 2(26.4,-9) 2(26.4,-8.2) 2(26.4,-7.4) 2(26.4,-6.6) 2(26.4,-5.8) 2(26.4,-5) 2(26.4,-4.2) 2(26.4,-3.4) 2(26.4,-2.6) 2(26.4,-1.8) 2(26.4,-1) 2(26.4,-0.2) 2(27.2,-13.8) 2(27.2,-13) 2(27.2,-12.2) 2(27.2,-11.4) 2(27.2,-10.6) 2(27.2,-9.8) 2(27.2,-9) 2(27.2,-8.2) 2(27.2,-7.4) 2(27.2,-6.6) 2(27.2,-5.8) 2(27.2,-5) 2(27.2,-4.2) 2(27.2,-3.4) 2(27.2,-2.6) 2(27.2,-1.8) 2(27.2,-1) 2(27.2,-0.2) 2(28,-13.8) 2(28,-13) 2(28,-12.2) 2(28,-11.4) 2(28,-10.6) 2(28,-9.8) 2(28,-9) 2(28,-8.2) 2(28,-7.4) 2(28,-6.6) 2(28,-5.8) 2(28,-5) 2(28,-4.2) 2(28,-3.4) 2(28,-2.6) 2(28,-1.8) 2(28,-1) 2(28,-0.2)

## Via types
v1: diameter 0.4, hole 0.3, Top Layer to Bottom Layer, 89 vias
v2: diameter 0.7, hole 0.5, Top Layer to Bottom Layer, 5 vias

## Nets (pads, with @x,y where several pads share a name; then routed paths per layer and width w, separated by ;. In a path a pad name is that pad's centre, name@x,y a point inside that pad or via, vN(x,y) a via of type N, cw(c..) or ccw(c..) an arc to the next point about the centre after c; other vN are vias at no path point)
EEPROM_CLK: R5.1 U1.62 U2.4 | length 21.1
  Top Layer w0.305: U1.62@-4.575,-5.011 -3.156,-5.011 -2.997,-4.851 2.794,-4.851 3.15,-4.496 v1(3.15,-3.404) ; U2.4@7.587,-2.012 v1(6.701,-2.012) 6.701,2.764 7.571,3.634 7.571,4.043 R5.1@7.999,4.47
  PWR w0.305: v1(3.15,-3.404) 5.309,-3.404 v1(6.701,-2.012)
EEPROM_CS: R1.1 U1.63 U2.5 | length 24.4
  Top Layer w0.305: U1.63@-4.575,-5.511 -2.999,-5.511 -2.761,-5.272 3.034,-5.272 3.632,-4.674 v1(3.632,-3.861) ; U2.5@7.587,-2.962 7.579,-2.954 6.764,-2.954 v1(6.756,-2.946) 6.172,-2.362 6.172,2.87 7.01,3.708 7.01,5.611 8.001,6.601 R1.1@8.001,6.756
  PWR w0.305: v1(3.632,-3.861) 5.842,-3.861 v1(6.756,-2.946)
EEPROM_DATA: R10.1 R12.1 U1.61 U2.3 | length 28.2
  Top Layer w0.305: U1.61@-4.575,-4.511 -3.556,-4.511 -3.414,-4.369 -2.82,-4.369 -2.642,-4.19 -2.642,0.178 -2.388,0.432 2.565,0.432 2.87,0.127 2.87,-2.337 v1(3.099,-2.565) ; R10.1@8,2.184 8.428,1.757 8.428,1.406 9.78,0.053 R12.1@9.78,-0.102 9.352,-0.529 9.352,-1.036 9.22,-1.168 v1(9.22,-2.007) 9.223,-2.009 10.284,-2.009 U2.3@10.287,-2.012
  PWR w0.305: v1(3.099,-2.565) 5.182,-2.565 6.502,-1.245 8.458,-1.245 v1(9.22,-2.007)